# Altium PCB dc_cdi_cx500.PcbDoc (part 2 of 2)
Units mm, origin at the board's own origin, x right, y up, seen from the top; angles counter-clockwise.
Board outline 71.5 x 104.26 mm, 4 copper layers (Top, Power Plane, Ground Plane, Bottom), stack 1.586 mm thick; 134 components, 88 nets, 414 pads, 279 vias.
Unrouted connection lines stored in the file: 58.
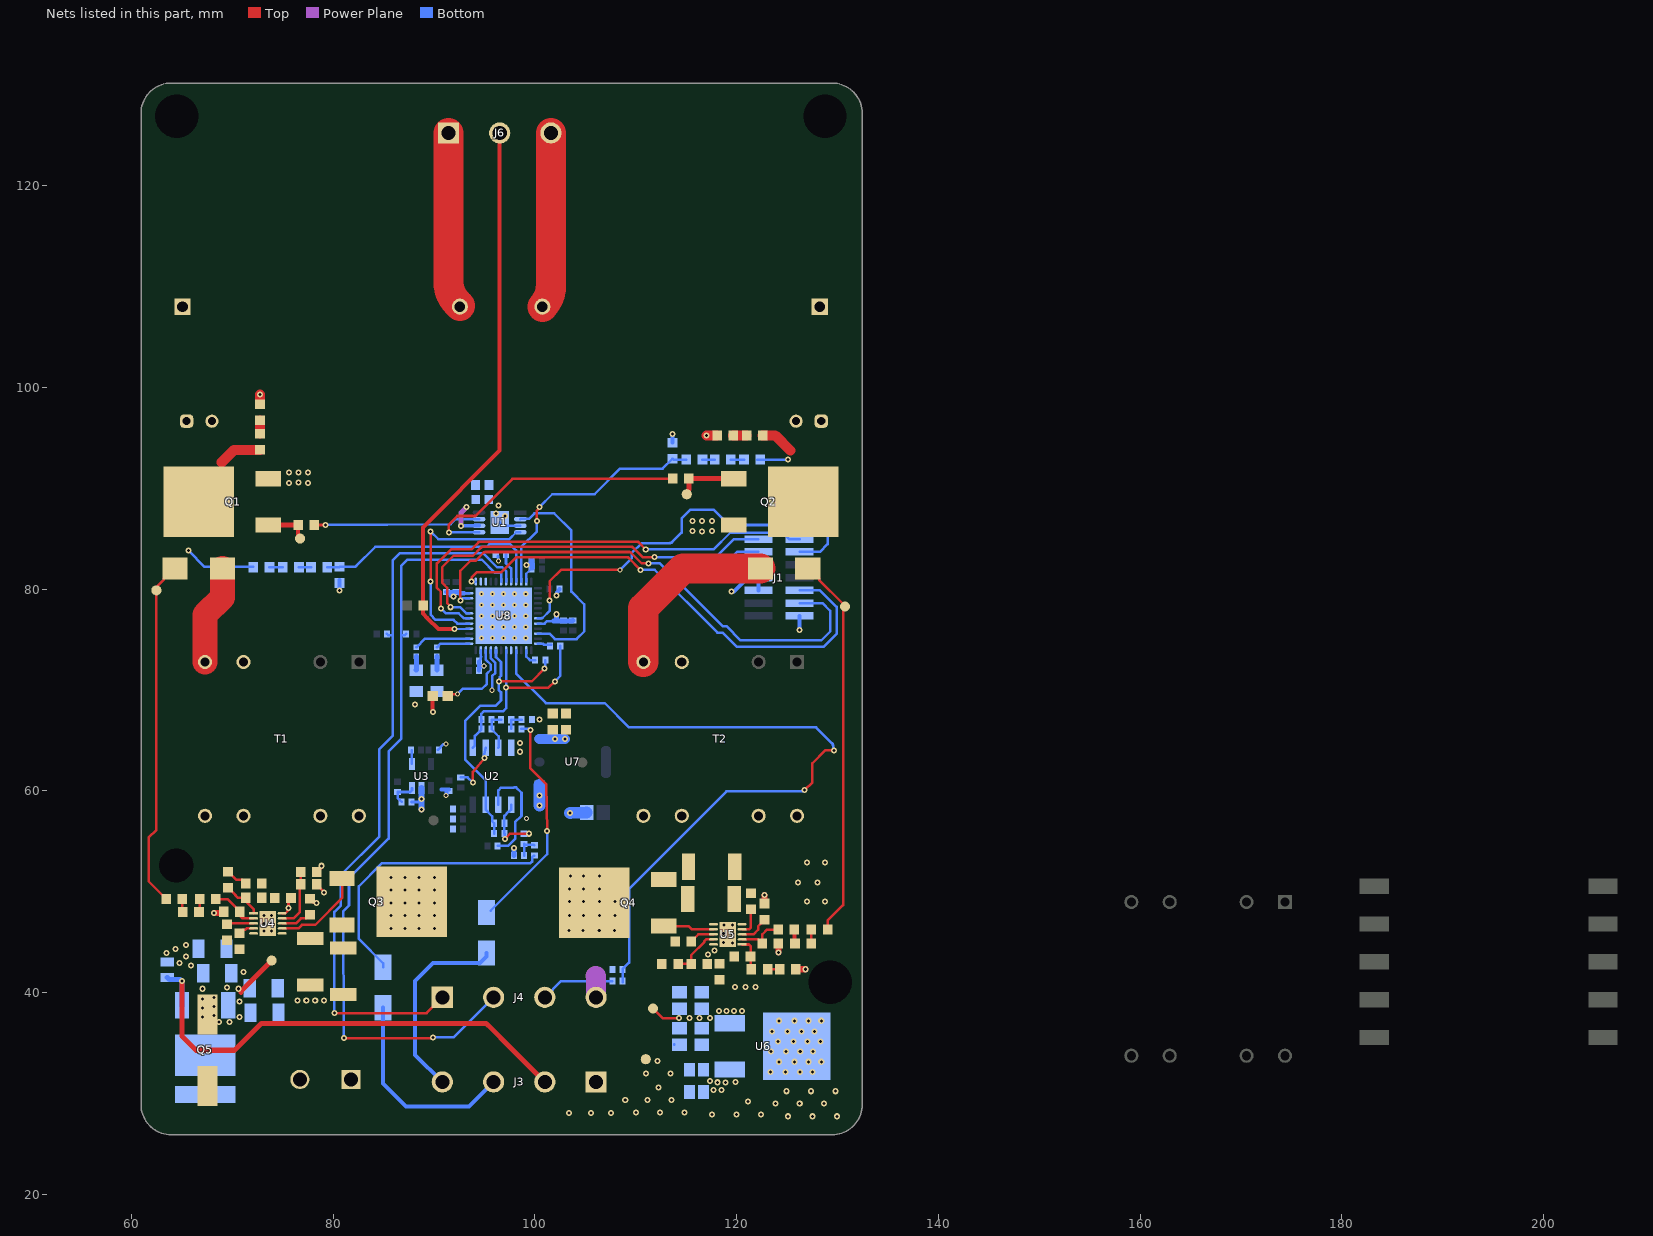
[diagram p4: the nets of this part, all layers, seen from the top]

## Via types
v1: diameter 0.6, hole 0.3, Top to Bottom, 244 vias
v2: diameter 0.5, hole 0.2, Top to Bottom, 25 vias
v3: diameter 0.5, hole 0.3, Top to Bottom, 10 vias

## Nets (pads, with @x,y where several pads share a name; then routed paths per layer and width w, separated by ;. In a path a pad name is that pad's centre, name@x,y a point inside that pad or via, vN(x,y) a via of type N, cw(c..) or ccw(c..) an arc to the next point about the centre after c; other vN are vias at no path point) (continued)
5V0: C2.1 C3.2 C26.1 C27.1 C31.1 C32.1 C33.1 C34.1 J4.4 pad.4@111.71,38.423 U1.6 U6.3 U7.3 | length 11.5
  Top w0.25: pad.4@111.71,38.423 112.668,37.465 v1(114.3,37.465)
  Power Plane w0.5: v1(92.682,86.28) 92.682,87.574 93.218,88.111 v1(93.218,88.138)
  Power Plane w2: 106.045,41.656 106.052,41.649 106.052,39.556 J4.4@106.071,39.537
  Bottom w0.4: v1(92.682,86.28) 94.059,86.289 U1.6@94.469,86.289
  Bottom w1: U7.3@100.464,65.155 v1(102.993,65.155) v1@102.997,65.151
  other v1: 115.316,37.465 116.332,37.465 117.348,37.465 118.272,38.162 119.759,38.172 119.006,38.19 120.538,38.19 101.981,65.151
ADC1_IN1: R40.2 U8.12 | length 1.4
  Bottom w0.25: U8.12@100.301,74.593 100.813,74.593 100.93,74.476 R40.2@101.605,74.476
ADC1_IN2: R47.2 U8.14 | length 1.7
  Bottom w0.25: U8.14@99.151,73.943 99.151,73.315 99.502,72.964 R47.2@100.037,72.964
ANALOG_SENSOR_1: R54.2 R55.2 U8.16 | length 74
  Top w0.25: v1(126.746,60.071) 127.508,60.833 127.508,62.738 128.778,64.008 v1(129.667,64.008)
  Bottom w0.25: U8.16@98.151,73.943 98.151,71.648 101.092,68.707 106.934,68.707 109.347,66.294 127.889,66.294 129.467,64.716 cw(c129.29,64.539) 129.54,64.539 ; R54.2@108.712,41.021 R55.2@108.712,42.291 108.712,42.341 109.347,42.976 109.347,50.292 118.999,59.944 126.619,59.944 v1(126.746,60.071) ; 129.528,64.597 129.528,64.551 129.6,64.479 129.6,64.075 v1(129.667,64.008)
ANALOG_SENSOR_2: U8.17
EXT_SENSOR1_I2C_SCL: J4.2 R37.2 U8.42 | length 77.6
  Top w0.25: v1(81.064,35.489) v1@89.718,35.489
  Bottom w0.25: v1(81.064,35.489) 81.019,48.08 81.58,48.641 81.58,51.354 85.506,55.28 85.506,63.916 86.741,65.151 86.741,75.438 ; R37.2@87.249,75.565 87.122,75.438 86.741,75.438 ; v1(89.918,35.562) 91.937,35.562 J4.2@95.911,39.537 ; U8.42@96.651,80.743 96.651,81.534 96.535,81.65 96.023,81.65 94.742,82.931 87.376,82.931 86.741,82.296 86.741,75.438
EXT_SENSOR1_I2C_SDA: J4.1 R38.2 U8.43 | length 72.6
  Top w0.25: v1(80.137,37.973) 89.267,37.973 J4.1@90.831,39.537
  Bottom w0.25: v1(80.137,37.973) 80.137,48.006 80.772,48.641 80.772,51.689 84.582,55.499 84.582,64.135 85.933,65.486 85.933,75.438 ; R38.2@85.344,75.565 85.471,75.438 85.933,75.438 ; U8.43@97.151,80.743 97.151,81.792 96.774,82.169 96.266,82.169 94.869,83.566 86.614,83.566 85.933,82.885 85.933,75.438
EXT_SENSOR2_I2C_SCL: U8.21 | length 4.3
  Bottom w0.25: U8.21@95.651,73.943 95.651,73.132 96.083,72.7 96.083,71.699 95.758,71.374 v3(95.758,69.977)
EXT_SENSOR2_I2C_SDA: U8.39
EXT_SENSOR3_SPI_NSS: U8.38
GND: C2.2 C3.1 C5.2 C6.2 C7.2 C9.2 C10.2 C11.2 C12.2 C13.1 C14.2 C16.1 C17.2 C18.1 C19.1 C20.1 C21.2 C22.2 C23.2 C24.2 C25.1 C26.2 C27.2 C28.2 C29.2 C30.2 C31.2 C32.2 C33.2 C34.2 C35.2 C36.2 C37.2 C38.2 C39.2 C41.2 C43.2 C44.2 C45.2 C46.1 C47.2 C48.2 C49.2 C50.2 C51.2 D5.1 D6.1 J1.2 J1.5 J1.7 J2.2 J3.1 pad.4@110.998,33.401 Q1.3 Q2.3 R7.1 R9.2 R14.1 R21.1 R22.1 R25.1 R26.1 R27.1 R28.1 R32.2 R34.2 R43.2 R45.1 R48.2 R49.1 R50.1 R52.1 R53.1 R55.1 T1.4 T2.4 U1.3 U1.9 U2.4 U3.2 U4.5 U4.11 U5.5 U5.11 U6.4 U7.1 U8.8 U8.23 U8.35 U8.47 U8.49 | length 44.7
  Top w0.4: C13.1@77.724,49.314 78.024,49.039 v1(78.359,48.895) ; R22.1@78.397,51.943 78.397,51.968 78.867,52.438 v1(78.867,52.578) ; C37.2@89.878,69.42 89.878,67.856 v1(89.916,67.818) ; v1(100.457,67.056) v1@100.459,67.058
  Top w0.6: v1(68.199,47.879) 69.015,47.879 R26.1@69.156,48.02 ; C21.2@122.782,48.835 v1(122.782,49.686) ; R49.1@124.146,44.866 124.179,44.833 v1(124.179,43.971) ; C36.2@125.868,42.32 v1(126.846,42.32)
  Top w1: C41.2@72.771,98.336 v1(72.771,99.314) ; v1(117.039,95.247) C43.2@118.072,95.25
  Bottom w0.25: C5.2@90.361,64.072 90.382,64.072 90.953,64.643 v3(91.186,64.643) ; 92.991,79.593 U8.35@93.501,79.593 ; C39.2@94.441,72.864 94.636,73.059 94.636,73.283 94.667,73.313 ; C39.2@94.463,72.838 C39.2@94.489,72.864 ; C38.2@94.489,71.929 C38.2@94.515,71.955 ; 94.651,73.329 U8.23@94.651,73.943 ; U1.9@96.52,86.614 96.845,86.289 U1.3@98.571,86.289 ; U8.47@99.151,80.743 99.151,81.529 C28.2@99.744,82.122 ; v1(99.187,82.396) 99.51,82.686 C29.2@99.744,83.022 ; U8.8@100.301,76.593 100.977,76.593 101.215,76.831 101.855,76.831
  Bottom w0.254: C33.2@113.818,34.855 C33.2@113.842,34.879
  Bottom w0.3: R9.2@87.793,58.889 88.445,58.889 v1(88.773,59.217) ; R34.2@96.338,83.272 v3(96.393,82.804)
  Bottom w0.4: v1(80.645,79.883) 80.645,80.332 R27.1@80.657,80.887 ; 90.759,60.144 90.763,60.14 C9.2@91.227,60.14 ; v3(91.186,59.563) 91.227,59.604 C9.2@91.227,60.14 ; C10.2@91.221,79.706 C11.2@92.188,79.706 ; C9.2@91.513,60.136 91.509,60.14 C9.2@91.227,60.14 ; C11.2@92.342,79.713 92.362,79.713 92.482,79.593 92.991,79.593 ; C38.2@94.463,71.936 C39.2@94.463,72.838 ; v3@99.174,57.29 v3(99.187,57.277) ; v1(102.145,79.358) 102.183,79.396 102.183,79.664 102.467,79.948 C44.2@102.467,79.998 ; R50.1@113.665,94.526 v1(113.665,95.377) ; R32.2@119.316,81.383 119.431,81.268 122.056,81.268 J1.7@122.171,81.153 J1.5@122.171,79.883 ; v1(119.507,79.756) 119.749,79.756 J1.7@121.146,81.153 ; v1(126.238,75.946) 126.241,75.949 J1.2@126.241,77.343
  Bottom w0.5: 94.517,72.333 v3(94.955,72.386) ; R14.1@97.917,53.594 v1(97.917,54.356) ; C29.2@99.685,82.911 99.735,82.861 99.735,82.494 99.744,82.484 C28.2@99.744,82.122 ; 101.855,76.831 102.134,76.831 ; v1@102.134,77.369 102.134,76.831 ; C24.2@103.759,76.906 103.709,76.856 102.934,76.856 102.909,76.831 102.134,76.831
  Bottom w0.6: v1(88.773,58.166) v1(88.773,59.217) U3.2@88.773,60.268 ; 91.679,79.515 v1(91.943,79.251)
  Bottom w1.2: v1(100.457,58.547) 100.464,58.554 v1(100.464,59.565) U7.1@100.464,60.575 ; v1(103.508,57.823) C25.1@105.131,57.861
  other v1: 125.119,27.744 127.532,27.744 129.945,27.744 117.584,27.925 119.997,27.925 122.41,27.925 107.569,28.067 103.386,28.082 105.581,28.082 110.014,28.105 112.427,28.105 114.84,28.105 123.849,29.014 126.262,29.014 128.675,29.014 121.14,29.195 108.966,29.337 111.157,29.375 113.57,29.375 124.968,30.226 127.381,30.226 129.794,30.226 112.276,30.587 111.023,31.962 113.436,31.962 123.347,32.129 124.871,32.129 126.268,32.129 127.538,32.129 124.206,33.147 125.73,33.147 127.127,33.147 128.397,33.147 112.166,33.232 123.393,34.159 124.917,34.159 126.314,34.159 127.584,34.159 124.112,35.175 125.636,35.175 127.033,35.175 128.303,35.175 123.534,36.143 125.058,36.143 126.455,36.143 127.725,36.143 124.206,37.211 125.73,37.211 127.127,37.211 128.397,37.211 76.454,39.243 77.343,39.243 78.232,39.243 79.121,39.243 67.056,40.386 119.861,40.542 120.877,40.542 121.893,40.542 65.913,42.672 64.77,42.926 65.405,43.561 63.5,43.942 64.389,44.323 65.405,44.704 119.596,44.92 118.72,44.959 119.596,45.809 118.72,45.848 73.156,46.106 73.918,46.106 118.749,46.719 119.596,46.698 73.156,46.868 73.918,46.868 73.156,47.63 73.918,47.63 127,49.022 128.778,49.022 126.111,50.927 128.016,50.927 126.99,52.898 128.768,52.898 98.552,63.881 98.552,64.77 88.138,68.58 102.134,77.513 116.586,85.725 115.641,85.743 117.546,85.743 116.586,86.741 115.641,86.759 117.546,86.759 97.028,87.249 96.139,87.503 96.418,88.308 75.621,90.533 77.526,90.533 76.581,90.551 75.621,91.549 77.526,91.549 76.581,91.567
  other v2: 94.701,75.143 95.801,75.143 96.901,75.143 98.001,75.143 99.101,75.143 94.701,76.243 95.801,76.243 96.901,76.243 98.001,76.243 99.101,76.243 94.701,77.343 95.801,77.343 96.901,77.343 98.001,77.343 99.101,77.343 94.701,78.443 95.801,78.443 96.901,78.443 98.001,78.443 99.101,78.443 94.701,79.543 95.801,79.543 96.901,79.543 98.001,79.543 99.101,79.543
IGNT_TRIG_L: U1.2 U8.10 | length 21.6
  Bottom w0.25: U1.2@98.571,86.939 98.606,86.975 99.421,86.975 99.949,87.503 101.925,87.503 103.632,85.796 103.632,79.756 104.902,78.486 104.902,75.819 104.14,75.057 101.981,75.057 101.445,75.593 U8.10@100.301,75.593
IGNT_TRIG_R: U1.4 U8.29 | length 21.8
  Top w0.25: v1(89.662,80.772) v1@89.662,85.598
  Bottom w0.25: v1(89.662,80.772) 89.662,77.47 90.17,76.962 91.948,76.962 92.317,76.593 U8.29@93.501,76.593 ; v1(89.662,85.725) 90.424,84.963 97.485,84.963 98.161,85.639 U1.4@98.571,85.639
L_COIL: C1.2 J6.1 | length 17.6
  Top w0.254: C1.2@92.575,108 C1.2@92.575,108.107
  Top w3: J6.1@91.44,125.222 91.44,110.484 ccw(c94.44,110.484) 92.316,108.365 C1.2@92.575,108.107
L_HV: C1.1 C12.1 C40.1 D3.1 pad.4@62.484,79.883 Q1.4 R16.2 R17.2 | length 46.1
  Top w0.254: R16.2@63.462,49.276 63.462,49.301 61.722,51.041 61.722,55.372 62.484,56.134 62.484,80.201 63.202,80.919 63.202,81.069 64.175,82.042 D3.1@64.325,82.042
  Top w1: 68.961,92.583 70.193,93.815 C40.1@72.771,93.815
  Bottom w0.254: v1(65.659,83.82) 67.264,82.215 R17.2@72.098,82.215
L_HV_FB: R23.1 R26.2 U4.2 | length 4.8
  Top w0.25: R23.1@68.364,49.276 69.525,49.276 70.756,48.045 R26.2@70.756,48.02 70.866,47.91 70.866,47.515 71.012,47.368 U4.2@72.121,47.368
LED1: R36.1 U8.25 | length 3.4
  Bottom w0.254: R36.1@90.297,74.237 90.653,74.593 U8.25@93.501,74.593
LED2: R35.1 U8.26 | length 5.6
  Bottom w0.254: R35.1@88.265,74.237 89.121,75.093 U8.26@93.501,75.093
NetC8_1: C8.1 R5.1 R8.2 U2.3 | length 5.1
  Bottom w0.2: C8.1@95.716,66.093 96.199,65.61 96.201,65.61 96.393,65.418 U2.3@96.393,64.293
  Bottom w0.25: C8.1@95.716,66.093 R8.2@95.716,67.069 95.723,67.063 96.64,67.063 R5.1@96.647,67.056 ; U2.3@96.393,64.293 96.44,64.34 96.44,65.418
NetC8_2: C8.2 R8.1 R40.1 U2.1 U8.18 | length 20.9
  Top w0.25: v1(97.155,70.231) 101.346,70.231 v1(101.981,70.866)
  Bottom w0.25: U2.1@93.853,64.293 94.053,64.493 94.053,65.446 94.7,66.093 94.7,66.887 R8.1@94.778,66.965 ; R8.1@94.7,67.069 94.7,67.649 94.93,67.879 96.835,67.879 97.151,68.195 U8.18@97.151,73.943 ; v1(101.981,70.866) 102.521,71.406 R40.1@102.521,74.376
NetC13_2: C13.2 U4.8 | length 3.1
  Top w0.254: U4.8@74.952,46.868 76.311,46.868 76.809,47.366 77.376,47.366 C13.2@77.724,47.714
NetC15_1: C15.1 R13.1 R15.2 U2.5 | length 6.9
  Top w0.254: v1(97.028,55.245) 97.536,55.753 v1(99.441,55.753)
  Bottom w0.254: v1(97.028,55.245) 97.001,55.272 97.001,55.739 R15.2@96.975,55.766 C15.1@96.975,56.793 96.975,57.524 97.396,57.945 97.465,57.945 97.663,58.143 U2.5@97.663,58.643 ; R13.1@98.933,55.753 v1(99.441,55.753)
NetC15_2: C15.2 R15.1 R47.1 U2.7 U8.20 | length 27.8
  Top w0.25: v1@96.647,70.866 99.695,70.866 v1(100.965,72.136)
  Bottom w0.25: R15.1@95.959,55.766 C15.2@95.959,56.793 95.784,56.968 95.784,57.482 95.123,58.143 U2.7@95.123,58.643 95.123,61.087 93.091,63.119 93.091,66.929 94.615,68.453 96.139,68.453 96.647,68.961 96.647,69.766 96.447,69.966 v1(96.447,70.866) 96.514,70.933 96.514,71.279 96.647,71.412 96.647,72.771 96.151,73.267 U8.20@96.151,73.943 ; v1(100.965,72.136) 101.053,72.224 R47.1@101.053,72.964
NetC16_2: C16.2 U4.3 | length 2.7
  Top w0.25: C16.2@69.469,46.774 69.563,46.868 U4.3@72.121,46.868
NetC18_2: C18.2 U5.8 | length 2.5
  Top w0.25: C18.2@115.506,45.059 115.506,45.084 116.2,45.778 116.554,45.778
  Top w0.254: 116.554,45.778 U5.8@117.719,45.778
NetC19_2: C19.2 R29.2 U4.1 | length 4
  Top w0.254: R29.2@69.596,50.381 69.621,50.381 70.328,49.674 70.328,49.649 70.574,49.403 C19.2@71.336,49.403 ; C19.2@71.082,49.314 72.121,48.275 U4.1@72.121,47.868
NetC20_2: C20.2 R29.1 | length 2.2
  Top w0.25: R29.1@69.596,51.981 69.621,51.981 70.427,51.175 70.986,51.175 71.336,50.825 C20.2@71.336,50.8
NetC21_1: C21.1 U5.3 | length 3.1
  Top w0.25: U5.3@120.55,45.778 121.668,45.778 122.147,46.257 122.147,46.6 122.407,46.86 122.407,46.885 122.757,47.235 C21.1@122.782,47.235
NetC35_1: C35.1 R51.1 U5.1 | length 3.2
  Top w0.254: U5.1@120.55,44.778 120.556,44.772 121.219,44.772 121.385,44.606 C35.1@121.385,43.578 121.385,42.409 R51.1@121.474,42.32
NetC36_1: C36.1 R51.2 | length 1.2
  Top w0.254: R51.2@123.074,42.32 C36.1@124.268,42.32
NetC37_1: C37.1 U8.22 | length 8.1
  Top w0.25: C37.1@91.378,69.42 91.554,69.596 v3(92.329,69.596)
  Bottom w0.25: v3(92.329,69.596) 92.837,70.104 94.742,70.104 95.25,70.612 95.25,71.628 95.631,72.009 95.631,72.517 95.151,72.997 U8.22@95.151,73.943
NetC40_2: C40.2 C41.1 | length 1.3
  Top w1: C40.2@72.771,95.415 C41.1@72.771,96.736
NetC42_2: C42.2 C43.1 | length 1.3
  Top w1: C43.1@119.672,95.25 C42.2@120.993,95.25
NetD1_1: D1.1 J3.4 | length 19.5
  Bottom w0.4: J3.4@90.831,31.147 88.138,33.84 88.138,41.148 89.916,42.926 94.546,42.926 95.196,43.576 D1.1@95.196,43.934
NetD1_2: D1.2 R4.2 | length 21.8
  Top w0.25: v1(99.568,66.04) 99.568,62.23 101.146,60.652 v1(101.219,56.007)
  Bottom w0.25: D1.2@95.631,48.133 101.219,53.721 v1(101.219,56.007) ; R4.2@98.679,66.143 99.465,66.143 v1(99.568,66.04)
NetD2_1: D2.1 J3.3 | length 20.4
  Bottom w0.4: D2.1@84.963,38.513 84.963,30.988 87.249,28.702 93.466,28.702 J3.3@95.911,31.147
NetD2_2: D2.2 R12.2 | length 27.9
  Bottom w0.25: D2.2@84.963,42.513 84.963,42.913 82.55,45.326 82.55,50.546 84.763,52.759 cw(c84.94,52.582) 84.94,52.832 99.464,52.832 ccw(c99.464,53.082) 99.641,52.905 99.724,52.988 99.724,53.419 99.899,53.594 R12.2@99.949,53.594
NetD3_2: D3.2 T1.5 | length 10
  Top w2.5: T1.5@67.31,72.771 67.31,77.47 69.025,79.185 D3.2@69.025,82.042
NetD4_2: D4.2 T2.5 | length 18.6
  Top w3: T2.5@110.76,72.771 110.76,78.121 114.681,82.042 D4.2@122.365,82.042
NetD5_2: D5.2 R35.2 | length 1.4
  Bottom w0.5: D5.2@88.243,71.964 88.254,71.975 88.254,73.326 R35.2@88.265,73.337
NetD6_2: D6.2 R36.2 | length 1.4
  Bottom w0.5: D6.2@90.297,71.964 R36.2@90.297,73.337
NetJ1_11: J1.11 R32.1 | length 3.1
  Bottom w0.25: R32.1@119.316,82.983 119.341,82.983 120.051,83.693 J1.11@122.171,83.693
NetJ1_12: J1.12 U8.7 | length 41.3
  Top w0.25: v1(101.473,78.867) 101.473,80.784 102.604,81.915 v3(108.458,81.915)
  Bottom w0.25: U8.7@100.301,77.093 U8.7@100.611,77.093 ; v1(101.473,78.867) 101.473,77.851 100.788,77.166 ; v3(108.458,81.915) 109.601,83.058 109.601,83.566 110.608,84.573 113.429,84.573 ; 113.434,84.582 ccw(c113.434,84.832) 113.611,84.655 114.554,85.598 114.554,86.995 115.443,87.884 117.729,87.884 119.253,86.36 128.143,86.36 129.032,85.471 129.032,84.455 128.27,83.693 J1.12@126.241,83.693 ; U8.7@100.611,77.093 ccw(c100.611,77.343) 100.788,77.166 ; U8.7@100.611,77.093 ccw(c100.611,77.343) 100.788,77.166
NetJ3_2: J3.2 Q5.1 R45.2 | length 49.5
  Top w0.5: v1(65.024,41.148) 65.024,35.687 66.421,34.29 70.231,34.29 72.898,36.957 94.974,36.957 cw(c94.974,36.457) 95.326,36.811 97.791,34.347 J3.2@100.991,31.147
  Bottom w0.5: R45.2@63.562,41.501 63.765,41.298 64.847,41.298 64.997,41.148 v1(65.024,41.148) 65.017,41.141 65.017,38.751 Q5.1@65.01,38.744
NetJ4_3: J4.3 R54.1 | length 7.4
  Bottom w0.25: J4.3@100.991,39.537 102.602,41.148 R54.1@107.696,41.148
NetJ6_2: J6.2 R33.1 U8.28 | length 55.3
  Top w0.4: v1(92.039,76.065) 90.432,76.065 89.383,77.114 88.9,77.597 88.9,86.106 96.52,93.726 J6.2@96.52,124.46
  Bottom w0.2: v1(92.039,76.065) 93.4,76.065 ccw(c93.399,76.265) U8.28@93.501,76.093
NetQ1_1: pad.5@76.73,85.012 Q1.1 R1.1 | length 4.6
  Top w0.4: R1.1@76.543,86.36 76.542,86.06 76.54,85.37 ccw(c76.94,85.369) 76.655,85.088 pad.5@76.73,85.012
  Top w0.5: Q1.1@73.575,86.346 R1.1@76.754,86.346
NetQ2_1: pad.5@115.062,89.408 Q2.1 R2.2 | length 5.8
  Top w0.5: R2.2@115.053,90.974 115.043,90.984 119.681,90.984 Q2.1@119.719,90.946 ; 115.268,89.87 R2.2@115.268,90.984
NetQ3_1: Q3.1 U4.7 | length 9.1
  Top w0.254: U4.7@74.952,46.368 76.555,46.368 76.91,46.723 78.232,46.723 80.896,49.387 Q3.1@80.896,51.322
NetQ3_3: Q3.3 R21.2 R52.2 U4.6
NetQ3_4: Q3.4 T1.6 T1.9
  other v1: 85.729,46.36 87.126,46.36 88.523,46.36 90.047,46.36 85.729,47.63 87.126,47.63 88.523,47.63 90.047,47.63 85.729,48.9 87.126,48.9 88.523,48.9 90.047,48.9 85.729,50.17 87.126,50.17 88.523,50.17 90.047,50.17 85.725,51.435 87.122,51.435 88.519,51.435 90.043,51.435
NetQ4_1: Q4.1 U5.7 | length 5.1
  Top w0.254: Q4.1@112.776,46.597 115.251,46.597 115.57,46.278 U5.7@117.719,46.278
NetQ4_3: Q4.3 R28.2 R53.2 U5.6
NetQ4_4: Q4.4 T2.6 T2.9
  other v1: 103.39,46.158 104.787,46.158 106.387,46.158 107.911,46.158 103.429,47.625 104.826,47.625 106.426,47.625 107.95,47.625 103.429,49.022 104.826,49.022 106.426,49.022 107.95,49.022 103.429,50.292 104.826,50.292 106.426,50.292 104.826,51.562 106.426,51.562 103.555,51.583
NetR1_2: R1.2 U1.7 | length 16.8
  Top w0.254: R1.2@77.851,86.36 v1(79.248,86.36)
  Bottom w0.254: v1(79.248,86.36) 91.641,86.434 92.146,86.939 U1.7@94.469,86.939
NetR2_1: R2.1 U1.5 | length 28.1
  Top w0.254: v1(91.478,85.638) 91.478,86.398 92.329,87.249 94.107,87.249 97.79,90.932 113.617,90.932 R2.1@113.668,90.984 R2.1@113.893,90.984
  Bottom w0.254: v1(91.478,85.638) 94.059,85.639 U1.5@94.469,85.639
NetR3_1: R3.1 U2.2 | length 5.3
  Top w0.25: v1(93.853,60.833) 93.853,61.88 v1(94.996,63.246)
  Bottom w0.25: R3.1@92.656,61.341 93.345,61.341 v1(93.853,60.833) ; v1(94.996,63.246) 94.996,63.593 U2.2@95.123,64.293
NetR4_1: R4.1 R5.2 R7.2 | length 1.9
  Bottom w0.25: R4.1@97.663,66.143 R5.2@97.663,67.056 97.666,67.059 98.685,67.059 R7.2@98.688,67.061
NetR6_2: R6.2 R9.1 U3.3 | length 2.9
  Bottom w0.254: R9.1@86.79,58.903 86.79,58.925 86.604,59.112 86.581,59.112 86.395,59.298 R6.2@86.395,59.893 87.65,59.893 87.823,60.066 U3.3@87.823,60.268
NetR10_2: R10.2 U3.4 | length 1.4
  Bottom w0.25: R10.2@87.811,64.022 87.817,64.016 87.817,62.674 U3.4@87.823,62.668
NetR11_1: R11.1 U2.6 | length 10.9
  Bottom w0.25: R11.1@96.315,54.558 97.357,54.558 98.044,55.245 98.044,56.896 98.679,57.531 98.679,59.817 98.148,60.348 97.94,60.348 97.917,60.325 96.666,60.325 96.393,60.052 U2.6@96.393,58.643
NetR12_1: R12.1 R13.2 R14.2 | length 2.2
  Bottom w0.25: R14.2@98.933,53.594 R13.2@98.933,54.737 98.996,54.673 99.885,54.673 R12.1@99.949,54.61
NetR16_1: R16.1 R19.2 | length 1.3
  Top w0.254: R16.1@65.062,49.276 65.062,48.057 R19.2@65.113,48.006
NetR17_1: R17.1 R20.2 | length 1.3
  Bottom w0.254: R17.1@73.698,82.169 R20.2@75.019,82.169
NetR18_1: R18.1 R22.2 U4.9 | length 6
  Top w0.254: U4.9@74.952,47.368 76.07,47.368 76.708,48.006 76.708,50.654 R18.1@76.797,50.743 R22.2@76.797,51.943
NetR19_1: R19.1 R23.2 | length 1.3
  Top w0.254: R19.1@66.713,48.006 66.764,48.057 R23.2@66.764,49.276
NetR20_1: R20.1 R24.2 | length 1.2
  Bottom w0.25: R20.1@76.619,82.169 R24.2@77.813,82.169
NetR24_1: R24.1 R27.2 U8.45 | length 23
  Bottom w0.25: R24.1@79.413,82.169 80.607,82.169 R27.2@80.645,82.207 82.103,82.207 ccw(c82.103,82.457) 82.28,82.28 84.201,84.201 95.25,84.201 95.504,84.455 97.536,84.455 98.151,83.84 U8.45@98.151,80.743
NetR25_2: R25.2 U4.4 | length 1.6
  Top w0.25: R25.2@70.74,45.893 71.09,46.243 71.303,46.243 71.428,46.368 U4.4@72.121,46.368
NetR30_1: R30.1 R41.2 | length 1.4
  Top w0.25: R41.2@127.392,44.86 127.423,44.891 R30.1@127.423,46.257
NetR31_1: R31.1 R42.2 | length 1.3
  Bottom w0.25: R42.2@119.418,92.837 R31.1@120.739,92.837
NetR34_1: R34.1 U8.44 | length 2.9
  Bottom w0.254: R34.1@97.141,83.427 97.141,82.559 97.651,82.049 U8.44@97.651,80.743
NetR39_2: R39.2 R43.1 U5.9 | length 5.1
  Top w0.25: R43.1@114.202,42.852 114.213,42.841 R39.2@115.509,42.841 115.509,43.716 116.818,45.025 116.818,45.107 116.989,45.278 U5.9@117.719,45.278
NetR41_1: R41.1 R44.2 | length 1.4
  Top w0.4: R44.2@125.738,46.257 125.765,46.23 125.765,44.887 R41.1@125.792,44.86
NetR42_1: R42.1 R46.2 | length 1.2
  Bottom w0.254: R46.2@116.624,92.837 R42.1@117.818,92.837
NetR46_1: R46.1 R50.2 U8.46 | length 24.7
  Top w0.25: v1(100.203,86.741) 100.203,87.789 100.457,88.043 v1(100.457,88.138)
  Bottom w0.25: U8.46@98.651,80.743 98.651,84.173 100.203,85.725 v1(100.203,86.741) ; v1(100.457,88.138) 101.727,89.408 105.918,89.408 108.458,91.948 112.662,91.948 113.64,92.926 R50.2@113.665,92.926 113.754,92.837 R46.1@115.024,92.837
NetR48_1: R48.1 U5.4 | length 2.6
  Top w0.25: U5.4@120.55,46.278 121.245,46.278 121.392,46.424 121.392,47.06 121.385,47.067 R48.1@121.385,48.078
R_COIL: C4.2 J6.3 | length 17.4
  Top w3: C4.2@100.75,108 ccw(c98.6,110.092) 101.6,110.088 J6.3@101.6,125.222
R_HV: C4.1 C17.1 C42.1 D4.1 pad.4@130.752,78.282 Q2.4 R30.2 R31.2 | length 44.5
  Top w0.254: D4.1@127.065,82.042 127.215,82.042 128.188,81.069 128.188,80.919 130.556,78.551 130.556,48.686 129.023,47.153 R30.2@129.023,46.257
  Top w1: C42.1@122.593,95.25 123.825,95.25 125.349,93.726
  Bottom w0.254: R31.2@122.047,92.837 v1(125.095,92.837) v1@125.095,92.931
R_HV_FB: R44.1 R49.2 U5.2 | length 4.9
  Top w0.25: U5.2@120.55,45.278 122.159,45.278 122.546,44.891 R49.2@122.546,44.866 122.546,45.767 123.036,46.257 R44.1@124.138,46.257
SWCLK: J1.6 U8.37 | length 49.3
  Top w0.25: v1(93.735,80.736) 93.764,80.765 93.764,81.191 94.234,81.661 96.647,81.661 98.171,83.185 109.116,83.185 ; v1(110.49,81.915) 109.293,83.112 ; 109.116,83.185 cw(c109.116,82.935) 109.293,83.112 ; 109.116,83.185 cw(c109.116,82.935) 109.293,83.112
  Bottom w0.25: v1(93.735,80.736) U8.37@94.151,80.743 ; v1(110.49,81.915) 111.887,81.915 118.11,75.692 118.618,75.692 120.015,74.295 128.651,74.295 129.921,75.565 129.921,78.232 128.27,79.883 J1.6@126.241,79.883
SWDIO: J1.4 U8.34 | length 51.1
  Top w0.25: v1(92.622,78.874) 92.622,81.827 93.599,82.804 94.107,82.804 94.913,83.61 ; v1(111.252,82.55) 110.599,82.55 109.539,83.61 ; 94.913,83.61 cw(c95.089,83.433) 95.089,83.683 ; 94.913,83.61 cw(c95.089,83.433) 95.089,83.683 ; 95.089,83.683 109.362,83.683 ; 109.362,83.683 cw(c109.362,83.433) 109.539,83.61 ; 109.362,83.683 cw(c109.362,83.433) 109.539,83.61
  Bottom w0.25: v1(92.622,78.874) 92.841,79.093 U8.34@93.501,79.093 ; v1(111.252,82.55) 112.395,82.55 118.618,76.327 118.999,76.327 120.396,74.93 128.397,74.93 129.286,75.819 129.286,77.851 128.524,78.613 J1.4@126.241,78.613
UART_DEBUG_RX: J1.13 U8.31 | length 40.2
  Top w0.25: v1(91.649,78.208) 91.649,78.303 91.313,78.639 91.313,80.137 90.805,80.645 90.805,82.169 91.948,83.312 93.853,83.312 94.669,84.128 ; v1(111.887,83.185) 111.856,83.154 110.713,83.154 109.74,84.128 ; 94.669,84.128 cw(c94.846,83.951) 94.846,84.201 ; 94.669,84.128 cw(c94.846,83.951) 94.846,84.201 ; 94.846,84.201 109.563,84.201 ; 109.563,84.201 cw(c109.563,83.951) 109.74,84.128 ; 109.563,84.201 cw(c109.563,83.951) 109.74,84.128
  Bottom w0.25: v1(91.649,78.208) 92.619,78.196 92.964,77.851 92.968,77.851 93.226,77.593 U8.31@93.501,77.593 ; v1(111.887,83.185) 117.983,83.185 119.761,84.963 J1.13@122.171,84.963
UART_DEBUG_TX: J1.14 U8.30 | length 46.3
  Top w0.25: v1(90.68,78.098) 90.678,78.898 90.678,79.756 90.301,80.133 90.301,82.554 91.694,83.947 93.726,83.947 94.415,84.636 ; v1(110.998,83.947) 110.309,84.636 ; 94.415,84.636 cw(c94.592,84.459) 94.592,84.709 ; 94.415,84.636 cw(c94.592,84.459) 94.592,84.709 ; 94.592,84.709 110.132,84.709 ; 110.132,84.709 cw(c110.132,84.459) 110.309,84.636 ; 110.132,84.709 cw(c110.132,84.459) 110.309,84.636
  Bottom w0.25: v1(90.68,78.098) 91.181,77.597 92.456,77.597 92.96,77.093 U8.30@93.501,77.093 ; v1(110.998,83.947) 117.729,83.947 119.374,85.592 124.587,85.592 125.216,84.963 J1.14@126.241,84.963
VBAT: C22.1 C23.1 C45.1 C46.2 C47.1 C48.1 C49.1 C50.1 C51.1 pad.5@73.914,43.18 Q5.3 R18.2 R39.1 T1.7 T1.10 T2.7 T2.10 U4.10 U5.10 U6.1 | length 7.6
  Top w0.25: U4.10@74.952,47.868 75.264,47.868 75.679,48.283 v1@75.679,48.401 ; v1(75.581,48.401) 75.581,48.993 C45.1@75.746,49.368 ; R18.2@78.397,50.743 78.397,50.718 79.121,49.994 v1(79.121,49.911)
  Top w0.5: 70.866,40.005 70.866,40.132 pad.5@73.914,43.18
  other v1: 117.729,30.353 118.491,30.353 118.11,31.115 118.921,31.105 119.886,31.14 117.348,31.242 68.707,37.084 69.723,37.084 67.056,37.592 70.739,37.592 68.199,37.719 67.056,38.481 68.199,38.608 70.739,39.116 67.056,39.37 68.199,39.497 70.612,40.386 69.469,40.513 71.12,42.037 117.178,43.779 117.834,44.195
VBAT_0: J2.1 Q5.4
pads on no net: Designator78.1 Designator78.2 Designator78.3 Designator78.4 Designator78.5 Designator78.6 Designator78.7 Designator78.8 Designator78.9 Designator78.10 J1.1 J1.8 J1.9 J1.10 T1.1 T1.2 T2.1 T2.2 T3.1 T3.2 T3.4 T3.5 T3.6 T3.7 T3.9 T3.10 U1.1 U1.8 U8.2 U8.3 U8.4 U8.5 U8.6 U8.11 U8.13 U8.15 U8.19 U8.27 U8.32 U8.33 U8.40 U8.41

## Polygon pours and split planes (outlines as drawn)
GND on Bottom "BOTTOM_GNDPLANE" (solid, pour order 2): 87.396,92.456 106.299,92.456 109.982,88.773 126.111,88.773 130.648,84.236 130.648,74.895 128.651,72.898 117.221,72.898 114.173,75.946 108.204,75.946 107.061,74.803 107.061,71.12 111.633,66.548 111.633,54.483 107.696,50.546 101.6,50.546 100.965,49.911 100.965,43.658 101.824,42.799 126.591,42.799 128.446,45.212 133.826,45.212 134.366,23.114 63.119,23.114 59.436,26.797 59.436,52.959 61.595,55.118 82.042,55.118 84.582,57.658 84.582,88.773
GND on Bottom "NONET_L-01_P-001" (solid, pour order 5): 109.982,68.326 109.982,64.516 127,64.516 127.762,63.754 127.762,55.626 118.491,55.626 116.84,53.975 109.982,53.975 106.553,50.546 118.237,50.546 119.888,52.197 129.032,52.197 131.318,54.483 131.318,65.913 128.905,68.326
GND on Ground Plane "GNDPLANE" (solid, pour order 1): 54.344,133.008 54.344,20.867 141.339,20.867 141.339,133.008
GND on Top "TOP_GNDPLANE" (solid, pour order 4): 87.503,54.483 60.071,54.483 60.071,26.035 132.969,26.035 132.969,54.229 105.918,54.229 105.918,88.646 ccw(c104.14,88.646) 104.14,90.424 89.662,90.424 ccw(c89.662,88.265) 87.503,88.265
VBAT on Power Plane "VBAT_POUR" (solid, pour order 0): 54.656,133.223 54.656,21.082 141.651,21.082 141.651,133.223

## Other copper
Top:
  region net VBAT: 74.549,47.879 75.184,48.514 75.184,49.784 75.311,49.911 76.2,49.911 76.327,49.784 76.327,48.514 75.565,47.752 74.676,47.752
  region net GND: 118.337,44.78 119.253,43.226 119.253,43.053 120.142,43.053 120.242,43.153 120.242,43.844 119.988,44.098 119.988,46.648 120.242,46.648 120.242,48.543 119.199,48.543 118.337,46.987
  region net VBAT: 116.713,42.291 118.618,42.291 118.745,42.418 118.745,43.434 118.364,43.434 118.11,43.688 118.11,44.704 117.983,44.831 117.221,44.831 116.713,44.323 116.713,42.418
  region net NetQ4_3: 111.379,51.943 111.379,50.546 114.046,47.879 115.336,47.879 116.606,46.609 118.11,46.609 118.11,47.244 117.221,48.133 117.094,48.133 117.094,52.705 115.951,53.848 113.284,53.848
  region net GND: 74.93,34.671 73.914,33.655 66.548,33.655 65.913,33.02 65.913,29.464 66.802,28.575 76.962,28.575 78.74,30.353 78.74,34.417 77.597,35.56 75.692,35.56
  region net GND: 75.819,41.402 75.819,38.989 76.2,38.608 79.248,38.608 82.296,38.989 82.296,40.513 79.629,41.275
  region net GND: 72.009,89.916 78.105,89.916 78.105,92.075 72.009,92.075
  region net GND: 121.158,87.376 115.062,87.376 115.062,85.217 121.158,85.217
  region net GND: 72.39,50.288 72.39,51.31 73.412,51.31 73.798,50.768 74.803,50.768 74.803,48.514 74.353,48.064 74.353,45.621 72.704,45.621 72.704,48.581 72.39,48.895
  region net NetQ3_3: 78.232,45.974 79.756,47.498 82.169,47.498 82.169,47.244 82.423,46.99 82.423,43.815 82.169,43.561 79.629,43.561 78.74,44.45 76.454,44.45 75.819,45.085 74.911,45.085 74.531,45.465 74.531,45.974
  region net VBAT: 66.548,39.878 68.072,39.878 69.215,41.021 70.739,41.021 71.247,40.513 71.247,37.338 70.485,36.576 67.437,36.576 66.548,37.465
  region net 5V0: 101.469,66.386 101.473,66.382 101.473,65.024 101.727,64.77 103.251,64.77 103.505,65.024 103.505,66.423 103.379,66.548 101.6,66.548
  region net L_HV: 70.226,92.075 66.238,96.063 66.238,106.248 67.178,107.188 67.178,110.109 66.416,110.871 63.876,110.871 62.992,109.987 62.992,80.603 66.035,80.603 66.035,83.312 70.226,84.921
  region net R_HV: 123.19,92.075 127.381,96.266 127.381,106.045 126.238,107.188 126.238,110.109 127,110.871 129.54,110.871 130.175,110.236 130.175,85.344 128.524,80.708 125.349,80.708 125.031,83.376 123.19,85.217
Power Plane:
  region net NetQ4_4: 110.109,59.055 111.887,59.055 112.268,58.674 112.268,54.864 113.538,53.594 118.872,53.594 120.777,55.499 120.777,58.166 121.666,59.055 123.19,59.055 123.952,58.293 123.952,53.323 123.08,52.451 120.194,52.451 117.781,50.038 109.474,50.038 109.093,49.657 109.093,46.482 107.823,45.212 102.362,45.212 102.362,51.308
  region net 5V0: 121.031,36.068 112.014,36.068 107.188,40.894 97.211,40.894 97.211,50.612 97.211,51.562 102.235,55.88 104.394,58.039 104.394,63.381 103.386,64.389 101.727,64.389 100.965,65.151 100.965,68.453 102.616,70.104 102.616,82.931 100.965,84.582 100.965,87.63 102.235,88.9 104.013,88.9 105.857,87.056 105.857,56.186 104.013,54.483 99.822,50.612 99.822,43.307 101.854,41.275 118.237,41.275 121.031,38.481
  region net 5V0: 99.568,42.545 99.695,42.672 111.506,42.672 113.157,41.021 100.076,41.021 99.949,41.148
  region net NetQ3_4: 69.342,53.213 68.199,53.213 82.931,53.213 84.074,52.07 84.074,46.609 85.09,45.339 90.757,45.339 92.075,46.543 92.075,53.467 90.805,54.737 82.042,54.737 80.645,56.134 80.645,58.42 80.518,58.42 79.756,59.182 77.724,59.182 77.089,58.547 77.089,55.626 76.454,54.991 70.104,54.991 69.088,56.007 69.088,58.547 68.072,59.563 66.294,59.563 65.659,58.928 65.659,54.991 67.437,53.213
  region net 5V0: 93.108,86.866 92.207,86.866 92.207,85.471 92.583,85.217 101.092,85.217 101.473,85.598 101.346,85.725 101.346,86.36 101.219,86.36 101.092,86.233 93.108,86.233
Bottom:
  region net 3V3: 99.949,80.645 99.949,80.391 99.949,80.01 100.711,80.01 100.965,80.264 100.965,80.645
  region net GND: 62.865,44.196 62.865,42.418 64.643,42.418 66.294,41.097 66.294,40.132 66.548,39.878 67.437,39.878 67.818,40.259 67.818,43.053 67.437,43.434 67.437,45.212 67.183,45.466 65.151,45.466
  region net GND: 73.914,41.529 73.66,41.275 73.66,37.211 73.914,36.957 75.565,36.957 75.565,37.592 76.454,38.481 79.375,38.481 79.756,38.862 79.756,39.878 79.502,40.132 76.073,40.132 75.438,40.767 75.438,41.275 75.184,41.529
  region net GND: 97.536,65.024 97.663,65.151 98.806,65.151 99.187,64.77 99.187,63.5 99.06,63.373 97.536,63.373 97.282,63.627 97.282,65.024 97.409,65.024 97.536,65.151
  region net GND: 87.63,70.358 87.63,68.199 88.646,67.183 90.805,67.183 90.805,70.104 90.551,70.358
  region net GND: 95.504,88.011 94.996,88.519 94.996,90.805 96.012,90.805 96.012,89.154 97.409,88.011 97.917,86.487 99.06,86.487 99.06,86.233 98.933,86.106 97.917,86.106 97.409,85.598 97.282,85.725 95.504,85.725
  region net GND: 91.567,58.42 91.313,58.166 91.313,56.134 91.567,55.88 92.202,55.88 92.202,58.42 92.075,58.547 91.567,58.547
  region net VBAT_0: 82.804,34.29 80.518,34.29 80.137,33.909 80.137,29.972 73.025,29.972 70.485,32.512 70.485,35.687 70.104,36.068 64.262,36.068 63.754,35.56 63.754,28.956 65.278,27.432 81.534,27.432 83.185,29.083 83.185,33.909
  region net 3V3: 90.424,60.96 90.679,60.705 91.659,60.705 91.659,62.011 90.805,62.865 90.424,62.865 90.424,62.23
  region net 3V3: 92.583,58.293 93.472,59.182 94.217,59.182 94.217,56.512 93.301,55.88 92.583,55.88
  region net 3V3: 99.527,81.067 99.867,81.407 100.076,81.407 100.457,81.788 100.457,83.439 101.092,83.439 101.473,83.058 101.473,82.169 101.6,82.042 101.6,81.153 100.838,80.391 99.695,80.391
  region net VBAT: 120.904,33.02 120.777,33.02 120.65,33.147 116.459,33.147 116.205,32.893 116.205,29.591 116.332,29.464 117.602,29.464 117.983,29.845 118.872,29.845 119.634,30.607 120.65,30.607 120.904,30.861
  region net VBAT: 68.707,45.593 68.707,43.434 69.088,43.053 69.088,41.275 67.564,39.751 67.564,37.338 68.326,36.576 71.919,36.576 72.644,37.301 72.644,41.783 71.12,43.307 70.739,43.307 70.104,43.942 70.104,45.593
  region net 5V0: 121.031,38.354 121.031,36.068 120.777,35.814 113.919,35.814 113.538,36.195 113.538,38.227 113.792,38.608 120.777,38.608
  region net 5V0: 93.091,90.17 93.091,88.646 92.71,88.265 92.71,87.63 93.599,87.63 94.615,88.646 94.615,90.678 93.599,90.678

## Silkscreen, mask and mechanical layers (free items; w line width, h text height)
Top Overlay:
  drawing of 823 lines, arcs and shapes, not listed
  text "LEFT / CYLINDER" at 74.435,125.476 h3
  text "RIGHT / CYLINDER" at 104.521,125.349 h3
  text "<- TOOLING_HOLE_2" at 62.505,122.842 h1 r270
  text "KILL SW" at 93.091,118.491 h2
  text "warning! / high voltage" at 115.062,118.334 h2.5
  text "warning! / high voltage" at 74.295,118.11 h2.5
  text "200 mJ" at 83.938,96.88 h3
  text "rev1.3" at 102.948,91.786 h2.5
  text "DC-CDI" at 80.825,91.775 h7.5
  text "FULLY PROGRAMMABLE" at 82.627,89.505 h3
  text "R_GATE_TP" at 109.823,88.54 h1
  text "L_GATE_TP" at 77.437,84.603 h1
  text "HV_L_TP" at 62.69,75.599 h1 r90
  text "HV_r_TP" at 130.958,73.898 h1 r90
  text "3V3_TP" at 104.369,62.258 h1 r270
  text "1V65_TP" at 85.81,56.775 h1
  text "VBAT_TP" at 74.272,38.206 h1.1 r90
  text "5V0_TP" at 112.034,38.131 h1
  text "TOOLING_HOLE_1 ->" at 130.577,37.838 h1 r270
  text "gnd" at 73.8,36.215 h2
  text "12vdc" at 78.88,36.223 h2
  text "GND_TP" at 109.85,34.565 h1
Bottom Overlay:
  drawing of 410 lines, arcs and shapes, not listed
  text "warning! / high voltage" at 109.864,110.998 h2.5
  text "@andrealanzolla" at 62.466,110.968 h1.1 r270
  text "DEBUG" at 131.257,87.264 h2

## Text inside footprints (layer, text, board x,y; h text height)
C12: Top Overlay "+" at 64.008,93.345 h1 r180
C17: Top Overlay "+" at 130.847,96.15 h1